# Altium PCB Logic_Analyzer.PcbDoc
Units mm, origin at the board's own origin, x right, y up, seen from the top; angles counter-clockwise.
Board outline 40 x 30.03 mm, 2 copper layers (Top Layer, Bottom Layer); 45 components, 43 nets, 221 pads, 27 vias.
Unrouted connection lines stored in the file: 119.
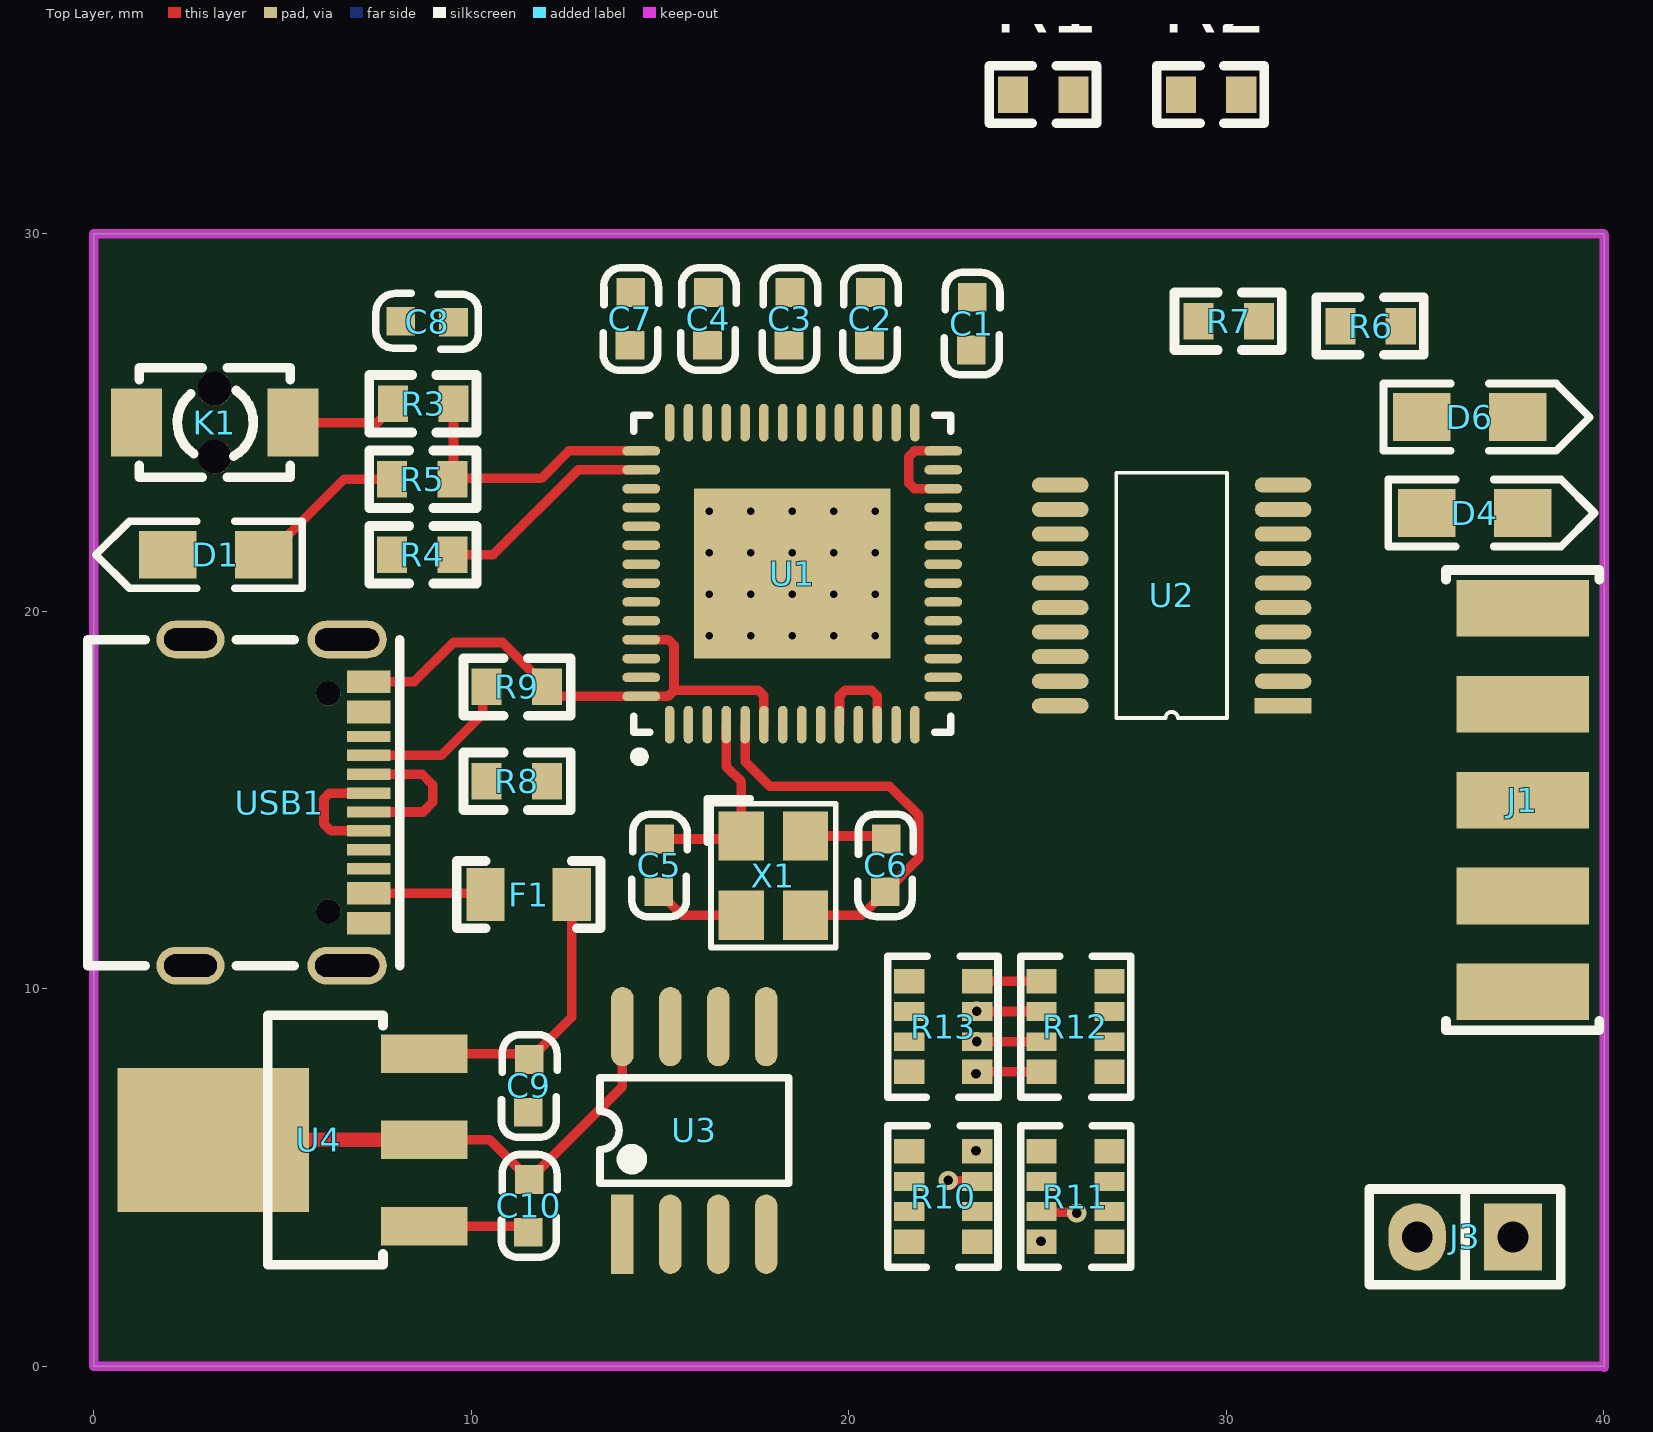
[diagram p0: Top Layer view]
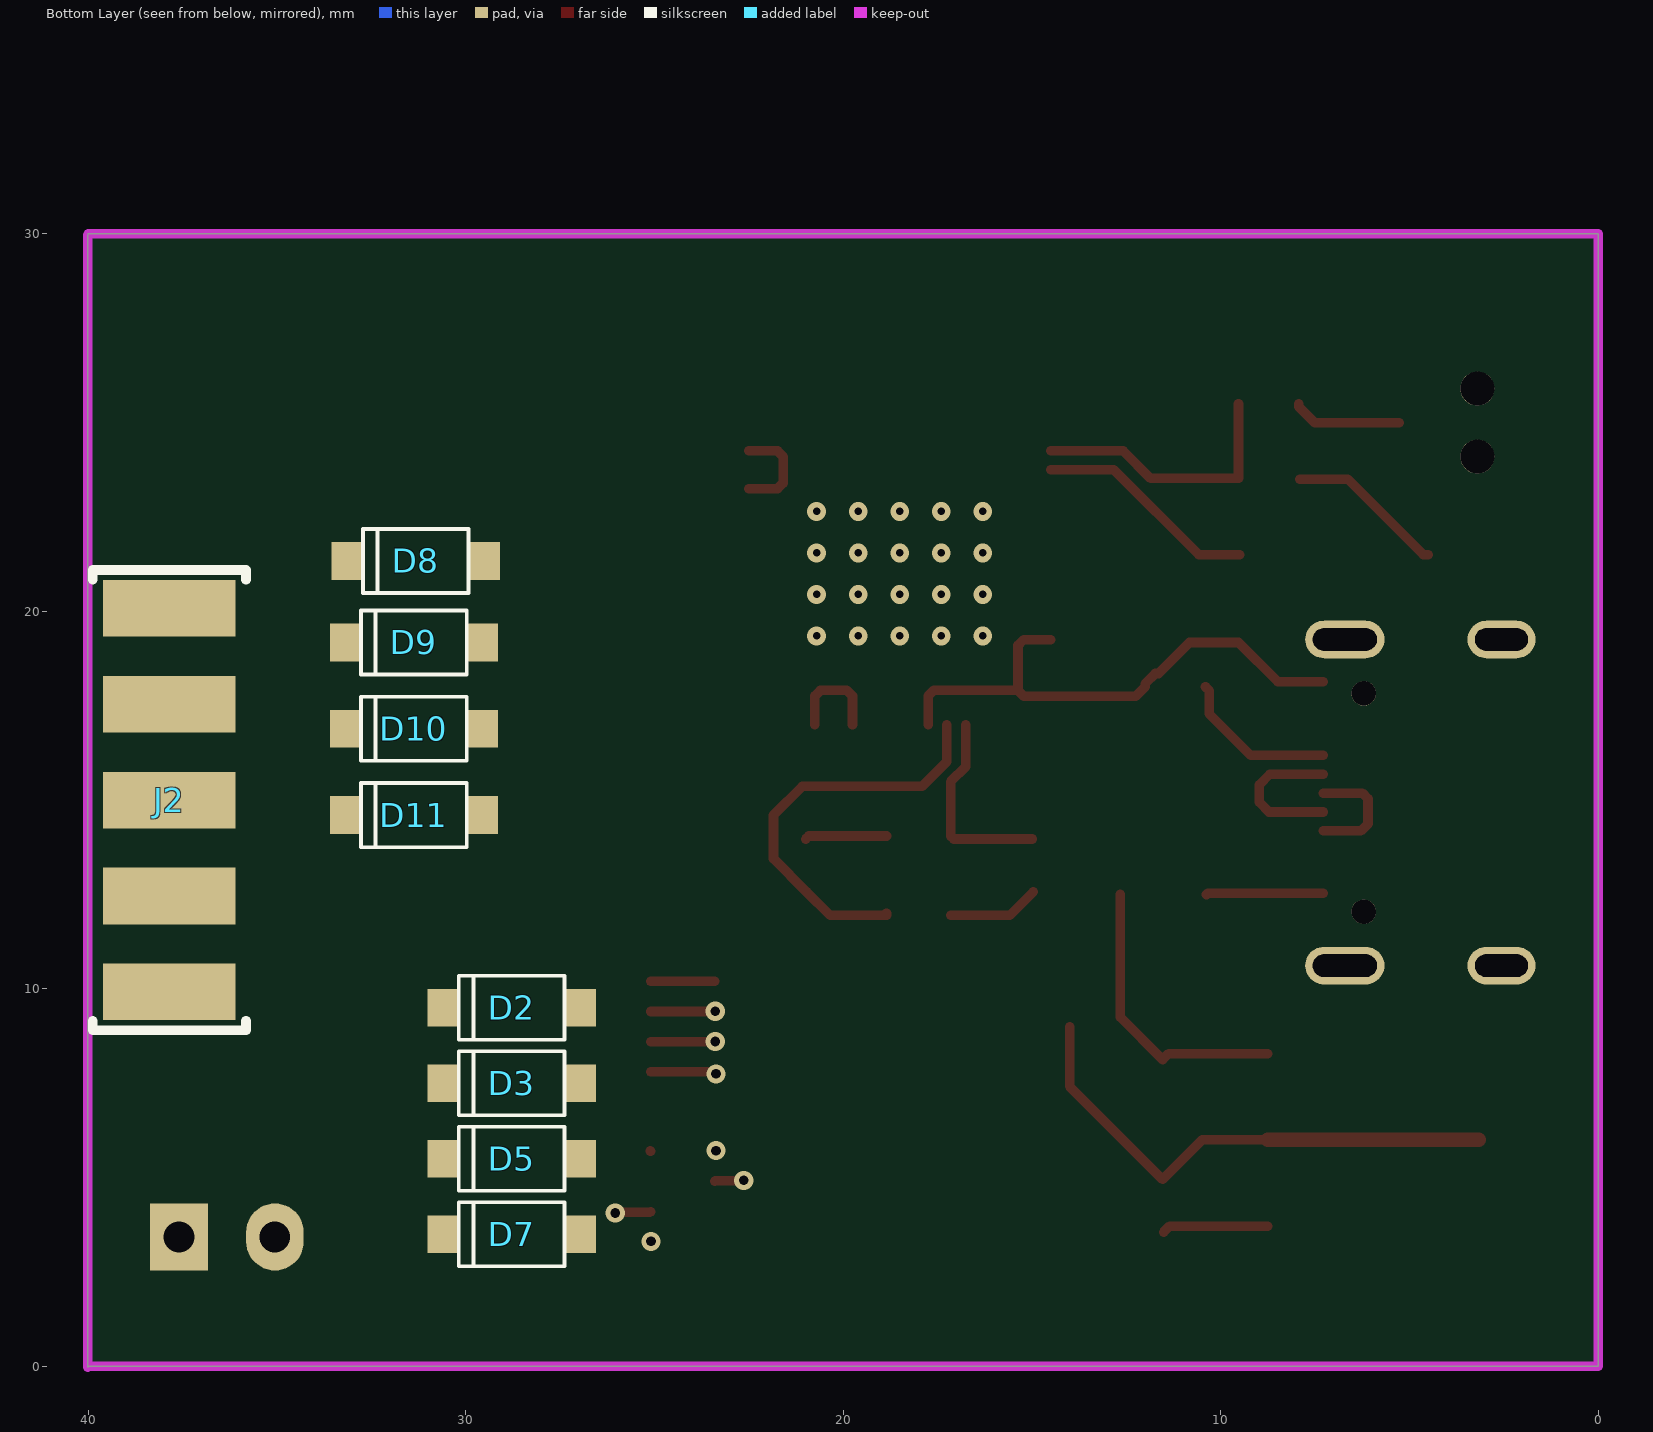
[diagram p1: Bottom Layer view, seen from below]

## Layer stack, top to bottom
Top Solder: solder mask 0.0102, Solder Resist, Dk 3.5
Top Layer: signal copper 0.0356
Dielectric 1: dielectric 0.32, FR-4, Dk 4.8
Bottom Layer: signal copper 0.0356
Bottom Solder: solder mask 0.0102, Solder Resist, Dk 3.5

## Board outline
0,0 40,0 40.005,-0.028 40.005,29.972 40,30 0,30

## Design rules (kind name [scope] priority, off if disabled: settings)
Clearance Clearance_1 [All] p1: gap=0 ignorepadtopadclearanceinfootprint=TRUE
Clearance [InComponent('U1')] p2: gap=0.254 ignorepadtopadclearanceinfootprint=TRUE except(0: Arc-SMDPad Arc-Hole Track-SMDPad Track-Hole SMDPad-Hole THPad-Hole Via-Hole Fill-Hole Poly-Hole Region-Hole Text-Hole)
PolygonConnect [All] p1: connectstyle=Relief reliefconductorwidth=0.254 reliefentries=4 polygonreliefangle="90 Angle" airgapwidth=0.254
RoutingVias [All] p1: holewidth=0.711 width=1.27 viastyle="Through Hole" minholewidth=0.711 minwidth=1.27 maxholewidth=0.711 maxwidth=1.27
SolderMaskExpansion [All] p1: expansion=0.102 istentingtop=FALSE
Width [All] p1: maxlimit=0.762 minlimit=0.089 preferedwidth=0.254
30 further rules are at their usual default settings.

## Components (designator, comment, footprint, x,y, rotation, side; value= is the part's Value field where it differs from the comment)
C1 "100nF" 0603C 23.232,26.919 r90 top
C2 "100nF" 0603C 20.54,27.046 r90 top
C3 "100nF" 0603C 18.406,27.046 r90 top
C4 "100nF" 0603C 16.247,27.046 r90 top
C5 "20pF" 0603C 14.952,12.568 r90 top
C6 "20pF" 0603C 21,13.974 r270 top
C7 "100nF" 0603C 14.19,27.046 r90 top
C8 "100nF" 0603C 9.53,27.652 r180 top
C9 "10uF" 0603C 11.5,6.726 r90 top
C10 "10uF" 0603C 11.5,3.551 r90 top
D1 "0805R" LED-0805R 4.5,21.5 r180 top
D2 "FR107W" SOD-123 27,9.5 r0 bottom
D3 "FR107W" SOD-123 27,7.5 r0 bottom
D4 "0805B" LED-0805B 35.306,22.606 r0 top
D5 "FR107W" SOD-123 27,5.5 r0 bottom
D6 "0805Y" LED-0805Y 35.179,25.146 r0 top
D7 "FR107W" SOD-123 27,3.5 r0 bottom
D8 "FR107W" SOD-123 29.54,21.336 r0 bottom
D9 "FR107W" SOD-123 29.591,19.177 r0 bottom
D10 "FR107W" SOD-123 29.591,16.891 r0 bottom
D11 "FR107W" SOD-123 29.591,14.605 r0 bottom
F1 "ASMD0805-050" FUSE-0805 10.5,12.5 r0 top
J1 "Pin HDR1X5" "Pin HDR1X5/2.54mm-S-SMD" 37.85,20.08 r180 top locked
J2 "Pin HDR1X5" "Pin HDR1X5/2.54mm-S-SMD" 37.85,20.08 r0 bottom locked
J3 "Pin HDR1X2" "Pin HDR1X2/2.54mm-S" 37.592,3.429 r270 top
K1 "KEY" SW-SMD_L4.0-W2.9-P4.15-EH 3.2,25 r180 top
R1 "10K" 0603R 24.35,33.688 r0 top
R2 "10K" 0603R 28.795,33.688 r0 top
R3 "10K" 0603R 7.925,25.5 r0 top
R4 "10K" 0603R 9.5,21.5 r180 top
R5 "1K" 0603R 9.5,23.5 r180 top
R6 "1K" 0603R 33.02,27.559 r0 top
R7 "1K" 0603R 29.261,27.686 r0 top
R8 "5K1" 0603R 12,15.5 r180 top
R9 "5K1" 0603R 12,18 r180 top
R10 "100K" RES-ARRAY-SMD_0603-8P-L3.2-W1.6-BL 22.5,4.5 r90 top
R11 "150" RES-ARRAY-SMD_0603-8P-L3.2-W1.6-BL 26,4.5 r270 top
R12 "150" RES-ARRAY-SMD_0603-8P-L3.2-W1.6-BL 26,9 r270 top
R13 "100K" RES-ARRAY-SMD_0603-8P-L3.2-W1.6-BL 22.5,9 r90 top
U1 "CY7C68013A-56LTXC" CYP-LTX56-5200X4500TP_M 18.5,21 r90 top locked
U2 "74HC245TS" TSSOP20 31.5,17.5 r180 top
U3 "AT24C02" SOP8 14,3.5 r90 top
U4 "AMS1117" SOT223 8.75,6 r90 top
USB1 "TYPE-C16PIN" USB-C-SMD_TYPE-C16PIN 6.7,10.618 r90 top locked
X1 "24Mhz" "OSC 3225-4P" 18,13 r270 top

## Footprints (in the part's own frame and the unit in brackets; to place one, negate y for a bottom-side part, rotate by r counter-clockwise, add the part's x,y. Pads: shape width x height; smd on the part's side, far side on the other; paste and mask are expansions set on the pad)
0603C [mil]
  rect 30x30 smd: 1(0.21,-0.35) 2(55.21,-1.35)
  silkscreen extent -26,-30 81,28, body extent -1,-15 62,17, height 12
0603R [mm]
  rect 0.8x0.965 smd: 1(0,0) 2(1.6,0)
  silkscreen extent -0.64,-0.76 2.21,0.76, body extent -0.04,-0.41 1.56,0.41, height 0.45
CYP-LTX56-5200X4500TP_M [mm] "QFN, 56-Leads, Body 8.1x8.1mm, Pitch 0.5mm, Thermal Pad 5.2x4.5mm, IPC Low Density"
  oval 1x0.25 smd: 1(-4,3.25) 2(-4,2.75) 3(-4,2.25) 4(-4,1.75) 5(-4,1.25) 6(-4,0.75) 7(-4,0.25) 8(-4,-0.25) 9(-4,-0.75) 10(-4,-1.25) 11(-4,-1.75) 12(-4,-2.25) 13(-4,-2.75) 14(-4,-3.25) 29(4,-3.25) 30(4,-2.75) 31(4,-2.25) 32(4,-1.75) 33(4,-1.25) 34(4,-0.75) 35(4,-0.25) 36(4,0.25) 37(4,0.75) 38(4,1.25) 39(4,1.75) 40(4,2.25) 41(4,2.75) 42(4,3.25)
  oval 0.25x1 smd: 15(-3.25,-4) 16(-2.75,-4) 17(-2.25,-4) 18(-1.75,-4) 19(-1.25,-4) 20(-0.75,-4) 21(-0.25,-4) 22(0.25,-4) 23(0.75,-4) 24(1.25,-4) 25(1.75,-4) 26(2.25,-4) 27(2.75,-4) 28(3.25,-4) 43(3.25,4) 44(2.75,4) 45(2.25,4) 46(1.75,4) 47(1.25,4) 48(0.75,4) 49(0.25,4) 50(-0.25,4) 51(-0.75,4) 52(-1.25,4) 53(-1.75,4) 54(-2.25,4) 55(-2.75,4) 56(-3.25,4)
  rect 4.5x5.2 smd: 57(0,0)
  silkscreen extent -4.97,-4.2 4.2,4.2, body extent -4.05,-4.05 4.05,4.05, height 1
FUSE-0805 [mil]
  rect 40x55 smd: 1(-5,0) 2(85,0)
  silkscreen extent -35,-35 115,35, body extent 0,-24 79,24, height 20
LED-0805B [mil]
  rect 60x50 smd: A(0,0) K(100,0)
  silkscreen extent -40,-35 175,35, body extent 10,-25 89,25, height 32
LED-0805R [mil]
  rect 60x50 smd: A(0,0) K(100,0)
  silkscreen extent -40,-35 175,35, body extent 11,-24 89,25, height 32
LED-0805Y [mil]
  rect 60x50 smd: A(0,0) K(100,0)
  silkscreen extent -40,-35 175,35, body extent 11,-26 89,23, height 32
"OSC 3225-4P" [mm]
  rect 1.3x1.2 smd: 1(-1.05,-0.85) 2(1.05,-0.85) 3(1.05,0.85) 4(-1.05,0.85)
  silkscreen extent -2.03,-1.75 1.91,1.65, body extent -1.47,-1.27 1.73,1.23, height 0.7
"Pin HDR1X2/2.54mm-S" [mil]
  rect 70x60 hole 32: 1(0,0)
  oval 70x60 hole 32: 2(0,-100)
  silkscreen extent -50,-150 50,50, body extent -50,-150 50,50, height 336
"Pin HDR1X5/2.54mm-S-SMD" [mm]
  rect 3.5x1.5 smd: 1(0,0) 2(0,2.54) 3(0,5.08) 4(0,7.62) 5(0,10.16)
  silkscreen extent -2.03,-1.02 2.03,11.18
RES-ARRAY-SMD_0603-8P-L3.2-W1.6-BL [mm]
  rect 0.65x0.8 smd: 1(-1.2,-0.9) 4(1.2,-0.9) 5(1.2,0.9) 8(-1.2,0.9)
  rect 0.5x0.8 smd: 2(-0.4,-0.9) 3(0.4,-0.9) 6(0.4,0.9) 7(-0.4,0.9)
  silkscreen extent -1.87,-1.45 1.87,1.47
SOD-123 [mm] "塑封二极管"
  rect 0.8x1 smd: A(-0.051,0) K(3.607,0)
  silkscreen extent 0.38,-0.85 3.18,0.85, body extent -0.12,-0.89 3.73,0.81, height 1.43
SOP8 [mm]
  rect 2.1x0.6 smd: 1(0,0)
  oval 2.1x0.6 smd: 2(0,-1.27) 3(0,-2.54) 4(0,-3.81) 5(5.5,-3.81) 6(5.5,-2.54) 7(5.5,-1.27) 8(5.5,0)
  silkscreen extent 1.35,-4.41 4.15,0.6, body extent -0.36,-4.37 5.64,0.63, height 1.9
SOT223 [mil]
  rect 40x90 smd: 1(-90,0) 2(0,0) 3(90,0)
  rect 150x200 smd: 2(0,220)
  silkscreen extent -130,43 130,163, body extent -130,-30 126,246, height 65
SW-SMD_L4.0-W2.9-P4.15-EH [mm]
  rect 1.35x1.8 smd: 1(-2.075,0) 3(2.075,0)
  round 0.9 hole 0.9 unplated: ""(0,0.9) ""(0,-0.9)
  silkscreen extent -2,-1.45 2,1.45
TSSOP20 [mm]
  rect 1.5x0.4 smd: 1(0,0)
  oval 1.5x0.4 smd: 2(0,-0.65) 3(0,-1.3) 4(0,-1.95) 5(0,-2.6) 6(0,-3.25) 7(0,-3.9) 8(0,-4.55) 9(0,-5.2) 10(0,-5.85) 11(5.9,-5.85) 12(5.9,-5.2) 13(5.9,-4.55) 14(5.9,-3.9) 15(5.9,-3.25) 16(5.9,-2.6) 17(5.9,-1.95) 18(5.9,-1.3) 19(5.9,-0.65) 20(5.9,0)
  silkscreen extent 1.48,-6.18 4.42,0.33
USB-C-SMD_TYPE-C16PIN [mm]
  oval 1x2.1 hole 0.6 slot 1.7 at 90 deg: 1(8.638,-0.009) 2(-0.002,-0.009)
  oval 1x1.8 hole 0.6 slot 1.4 at 90 deg: 3(8.638,4.14) 4(-0.002,4.14)
  rect 0.6x1.15 smd: A1B12(7.518,-0.584) A4B9(6.718,-0.584) B1A12(1.118,-0.584) B4A9(1.918,-0.584)
  rect 0.3x1.15 smd: A5(5.568,-0.584) A6(4.568,-0.584) A7(4.068,-0.584) A8(6.068,-0.584) B5(2.568,-0.584) B6(3.568,-0.584) B7(5.068,-0.584) B8(3.068,-0.584)
  round 0.65 hole 0.65 unplated: ""(1.428,0.49) ""(7.208,0.49)
  silkscreen extent 0,-1.4 8.64,6.86

## Part data
C1 C2 C3 C4 C5 C6 C7 C8 C9 C10: library part CAP, "无极性电容"
D1 D4 D6: library part LED
D2 D3 D5 D7 D8 D9 D10 D11: library part DIODE, "普通二极管"
F1: library part FUSE
R1 R2 R3 R4 R5 R6 R7 R8 R9: library part RES
R10 R11 R12 R13: library part RES_ARRAY*4, "网络排阻4R"
U1: "EZ-USB(R) FX2LP(TM) USB Microcontroller High-Speed USB Peripheral Controller, 16 KB, 24 I/Os, 3 to 3.6 V, 0 to 70 degC, 56-Pin QFN (LTX56), Tray", Manufacturer=Cypress, Max. Operating Temp. (degreesC)=70, Max. Operating Voltage (V)=3.6, Min. Operating Temp. (degreesC)=0, Min. Operating Voltage (V)=3, Supplier Part Number 1=428-2933-ND, Code_JEDEC=MO-220, ComponentLink1Description="Manufacturer URL", ComponentLink1URL=http://www.cypress.com/, ComponentLink2Description=Datasheet, ComponentLink2URL=http://www.cypress.com/?docID=45142, ComponentLink3Description="Package Specification", ComponentLink3URL=http://www.cypress.com/?docID=47572, CPU Core="Enhanced 8051", DatasheetVersion="Rev. *W", Memory Architecture=RAM, Memory Size (KB)=16, Mounting Technology="Surface Mount", No. of I/Os=24, PackageDescription="56-Pin Sawn QFN, Body 8 x 8 mm, Pitch 0.5 mm", PackageReference=LTX56, PackageVersion="Rev. *D", Packing=Tray, PartNumber=CY7C68013A-56LTXC, RoHS=Pb-Free, Supplier 1=Digi-Key, Supplier 2=Newark, Supplier 3=Mouser, Supplier Part Number 2=50R9455, Supplier Part Number 3=727-CY7C68013A56LTXC
U3: BOM_JLCPCB Part Class="Extended Part", BOM_Manufacturer=IDCHIP, BOM_Manufacturer Part=AT24C02, BOM_Supplier=LCSC, BOM_Supplier Part=C688857, Contributor=LCSC, spicePre=U, spiceSymbolName=AT24C02
U4: "三端稳压芯片"
USB1: library part USB-C_16PIN, BOM_JLCPCB Part Class="Extended Part", BOM_Manufacturer="SHOU HAN", BOM_Manufacturer Part=TYPE-C16PIN, BOM_Supplier=LCSC, BOM_Supplier Part=C393939, Contributor=LCSC, spicePre=U, spiceSymbolName=TYPE-C16PIN
X1: library part XTAL-4P, "4脚无源晶振"

## Via types
v1: diameter 0.5, hole 0.2, Top Layer to Bottom Layer, 20 vias
v2: diameter 0.508, hole 0.254, Top Layer to Bottom Layer, tented both sides, 7 vias

## Nets (pads, with @x,y where several pads share a name; then routed paths per layer and width w, separated by ;. In a path a pad name is that pad's centre, name@x,y a point inside that pad or via, vN(x,y) a via of type N, cw(c..) or ccw(c..) an arc to the next point about the centre after c; other vN are vias at no path point)
3V3: C1.1 C2.1 C3.1 C4.1 C7.1 C10.2 D2.K D3.K D5.K D7.K D8.K D9.K D10.K D11.K R1.2 R2.2 R3.2 R4.2 R5.1 R10.5 R10.6 R10.7 R10.8 R13.5 R13.6 R13.7 R13.8 U1.3 U1.7 U1.11 U1.17 U1.27 U1.32 U1.43 U1.55 U2.20 U3.8 U4.2 | length 21.1
  Top Layer w0.254: U4.2@8.75,6 10.487,6 C10.2 14,7.419 U3.8 ; R3.2 9.525,23.525 11.855,23.525 12.58,24.25 U1.43
  Top Layer w0.381: U4.2@3.162,6 U4.2@8.75,6
GND: C1.2 C2.2 C3.2 C4.2 C5.1 C6.1 C7.2 C8.1 C9.1 C10.1 D1.K D4.K D6.K J1.1 J2.1 K1.3 R8.1 R9.1 U1.6 U1.10 U1.12 U1.14 U1.26 U1.28 U1.41 U1.53 U1.56 U2.1 U2.10 U2.19 U3.1 U3.2 U3.3 U3.4 U3.7 U4.1 USB1.1 USB1.2 USB1.3 USB1.4 USB1.A1B12 USB1.B1A12 X1.2 X1.4 | length 27.3
  Top Layer w0.254: USB1.A1B12 8.484,18.136 9.525,19.177 10.823,19.177 11.645,18.355 11.727,18.355 12,18.082 R9.1 12.25,17.75 15.21,17.75 15.367,17.907 ; U4.1 11.351,3.714 C10.1 ; U1.53 14.502,19.248 15.218,19.248 15.367,19.099 15.367,17.907 ; C5.1 15.584,11.95 X1.2 ; U1.6 17.75,17.758 17.601,17.907 15.367,17.907 ; X1.4 20.909,14.05 C6.1 ; U1.10 19.752,17.002 19.752,17.758 19.901,17.907 20.601,17.907 20.75,17.758 U1.12 ; U1.26 22.498,23.252 21.739,23.252 21.59,23.401 21.59,24.101 21.739,24.25 U1.28
I2C_SCL: J3.1 R2.1 U1.15 U3.6
I2C_SDA: J3.2 R1.1 U1.16 U3.5
IN0: D2.A R10.4 R11.1 U2.18 | length 0
  Top Layer w0.254: v2(23.368,5.715) 23.385,5.715 R10.4 ; R11.1 R11.1@25.106,5.706
IN1: D3.A R10.3 R11.2 U2.17 | length 0.8
  Top Layer w0.254: v2(22.632,4.927) 22.646,4.913 23.387,4.913 R10.3
IN2: D5.A R10.2 R11.3 U2.16 | length 0.9
  Top Layer w0.254: R11.3 25.118,4.082 26.017,4.082 v2(26.035,4.064)
IN3: D7.A R10.1 R11.4 U2.15 | length 0
  Top Layer w0.254: v2(25.089,3.311) R11.4
IN4: D8.A R12.1 R13.4 U2.14 | length 1.7
  Top Layer w0.254: R13.4 R12.1
IN5: D9.A R12.2 R13.3 U2.13 | length 1.7
  Top Layer w0.254: v2(23.389,9.407) 23.396,9.4 R13.3 R12.2
IN6: D10.A R12.3 R13.2 U2.12 | length 1.8
  Top Layer w0.254: R13.2@23.355,8.554 R13.2 R12.3
  other v2: 23.389,8.606
IN7: D11.A R12.4 R13.1 U2.11 | length 1.7
  Top Layer w0.254: R13.1 R12.4
  other v2: 23.368,7.747
NetC5_2: C5.2 U1.4 X1.1 | length 5.3
  Top Layer w0.254: C5.2 17.07,13.97 X1.1 17.15,15.489 16.75,15.889 U1.4
NetC6_2: C6.2 U1.5 X1.3 | length 11
  Top Layer w0.254: U1.5 17.25,16.024 17.907,15.367 21.082,15.367 21.844,14.605 21.844,13.45 C6.2 20.344,11.95 X1.3 X1.3@18.85,12
NetC8_2: C8.2 K1.1 R3.1 U1.42 | length 2.9
  Top Layer w0.254: K1.1 7.508,25 7.925,25.418 R3.1
NetC9_2: C9.2 F1.2 U4.3 | length 7.7
  Top Layer w0.254: U4.3 11.376,8.286 C9.2 12.659,9.253 F1.2
NetD1_A: D1.A R5.2 | length 4.2
  Top Layer w0.254: D1.A 4.627,21.5 6.627,23.5 R5.2
NetD4_A: D4.A R6.2
NetD6_A: D6.A R7.2
NetJ1_2: J1.2 R11.8
NetJ1_3: J1.3 R11.7
NetJ1_4: J1.4 R11.6
NetJ1_5: J1.5 R11.5
NetJ2_2: J2.2 R12.8
NetJ2_3: J2.3 R12.7
NetJ2_4: J2.4 R12.6
NetJ2_5: J2.5 R12.5
NetR4_1: R4.1 U1.44 | length 5.9
  Top Layer w0.254: R4.1 10.578,21.5 12.828,23.75 U1.44
NetR8_2: R8.2 USB1.B5
NetR9_2: R9.2 USB1.A5 | length 4.2
  Top Layer w0.254: USB1.A5 9.201,16.186 10.3,17.285 10.3,17.9 R9.2
NetU1_18: U1.18 U2.2
NetU1_19: U1.19 U2.3
NetU1_20: U1.20 U2.4
NetU1_21: U1.21 U2.5
NetU1_22: U1.22 U2.6
NetU1_23: U1.23 U2.7
NetU1_24: U1.24 U2.8
NetU1_25: U1.25 U2.9
PA0: R6.1 U1.33
PA1: R7.1 U1.34
USB_N: U1.9 USB1.A7 USB1.B7 | length 4.1
  Top Layer w0.254: USB1.A7 8.717,14.686 8.975,14.944 8.975,15.409 8.698,15.686 USB1.B7
USB_P: U1.8 USB1.A6 USB1.B6 | length 3.2
  Top Layer w0.254: USB1.B6 6.283,14.186 6.096,14.373 6.096,15.037 6.245,15.186 USB1.A6
VBUS: F1.1 USB1.A4B9 USB1.B4A9 | length 3.1
  Top Layer w0.254: USB1.B4A9 10.337,12.536 F1.1
pads on no net: K1. U1.1 U1.2 U1.13 U1.29 U1.30 U1.31 U1.35 U1.36 U1.37 U1.38 U1.39 U1.40 U1.45 U1.46 U1.47 U1.48 U1.49 U1.50 U1.51 U1.52 U1.54 U1.57 USB1. USB1.A8 USB1.B8
copper on no net:
  other v1: 16.3,19.35 17.4,19.35 18.5,19.35 19.6,19.35 20.7,19.35 16.3,20.45 17.4,20.45 18.5,20.45 19.6,20.45 20.7,20.45 16.3,21.55 17.4,21.55 18.5,21.55 19.6,21.55 20.7,21.55 16.3,22.65 17.4,22.65 18.5,22.65 19.6,22.65 20.7,22.65

## Keep-outs
Keep-Out Layer:
  lines w0.254: 40,0 0,0 0,30 40,30 ; 40.005,-0.028 40.005,29.972

## Other copper
Top Layer:
  pour cut-out: 16.002,15.24 19.939,15.24 19.939,10.795 16.002,10.795